# Altium PCB Copy of WoodStoveLayout1.PcbDoc (part 3 of 5)
Units mil, origin at the board's own origin, x right, y up, seen from the top; angles counter-clockwise.
Board outline 4000 x 3000 mil, 4 copper layers (Top Layer, LGND, LPWR, Bottom Layer), stack 64.6 mil thick; 132 components, 92 nets, 551 pads, 393 vias.
Unrouted connection lines stored in the file: 127.
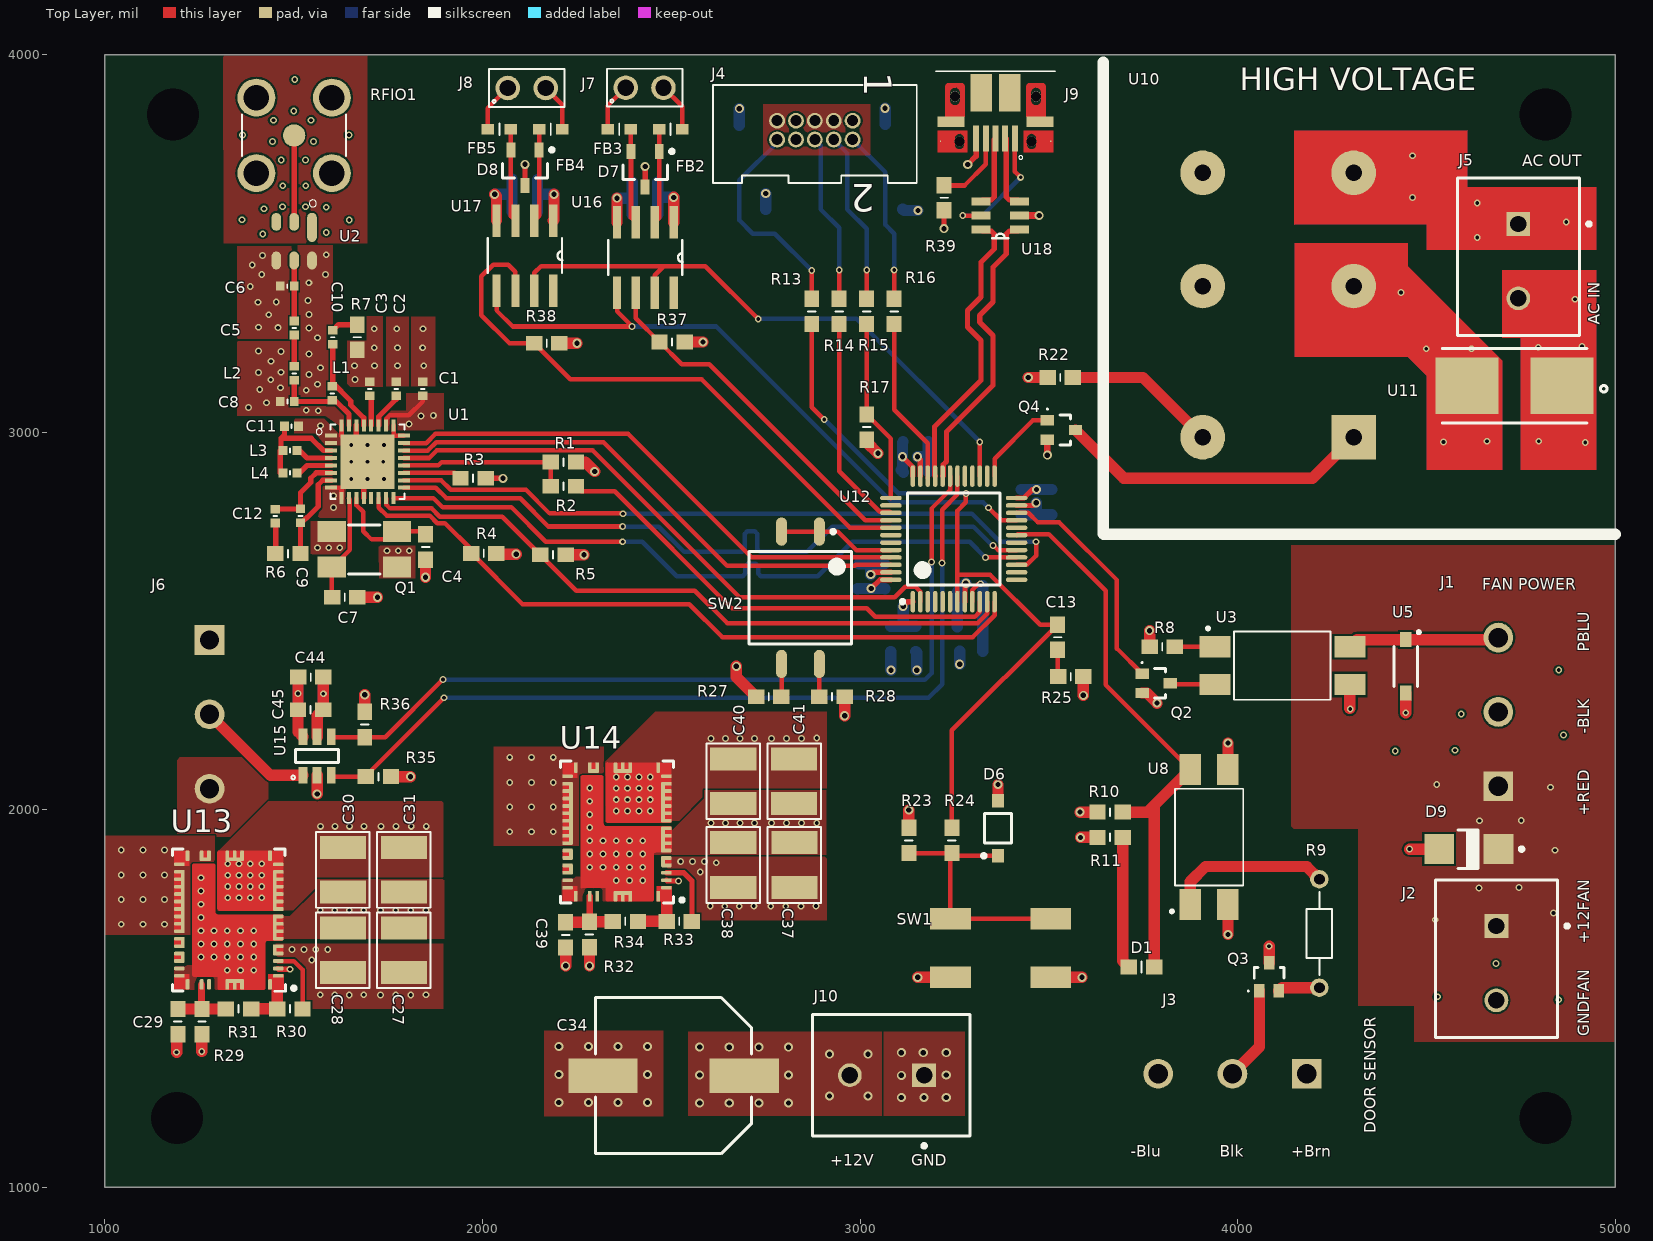
[diagram p0: Top Layer view]

## Part data (continued)
R6: Case/Package=0603, Case Code (Metric)=1608, Manufacturer=Vishay, Manufacturer Part Number=CRCW06036K80FKEA, Max Operating Temperature=155°C, Max Power Dissipation=100mW, Min Operating Temperature=-55°C, Package Quantity=10, Resistance=6.8k, Supplier Part Number 1=541-6.80KHTR-ND, Temperature Coefficient=100ppm/°C, Tolerance=1%, Voltage Rating=75V, Case Code (Imperial)=0603, ComponentLink1Description=https://datasheet.ciiva.com/11811/0900766b80d98afc-11811920.pdf, ComponentLink1URL=https://datasheet.ciiva.com/11811/0900766b80d98afc-11811920.pdf, ComponentLink2Description=https://datasheet.ciiva.com/2465/dcrcwe3-2465684.pdf, ComponentLink2URL=https://datasheet.ciiva.com/2465/dcrcwe3-2465684.pdf, ComponentLink3Description=https://datasheet.ciiva.com/2465/dcrcwe3-2465685.pdf, ComponentLink3URL=https://datasheet.ciiva.com/2465/dcrcwe3-2465685.pdf, ComponentLink4Description=https://datasheet.ciiva.com/2465/dcrcwe3-2465686.pdf, ComponentLink4URL=https://datasheet.ciiva.com/2465/dcrcwe3-2465686.pdf, ComponentLink5Description=https://datasheet.ciiva.com/26314/fld-crcw-e3-data-en-26314745.pdf, ComponentLink5URL=https://datasheet.ciiva.com/26314/fld-crcw-e3-data-en-26314745.pdf, ComponentLink6Description=https://datasheet.ciiva.com/16771/70201119-16771274.pdf, ComponentLink6URL=https://datasheet.ciiva.com/16771/70201119-16771274.pdf, ComponentLink7Description=https://datasheet.ciiva.com/22870/70201119-22870027.pdf, ComponentLink7URL=https://datasheet.ciiva.com/22870/70201119-22870027.pdf, ComponentLink8Description=https://datasheet.ciiva.com/3257/dcrcwe3-3257852.pdf, ComponentLink8URL=https://datasheet.ciiva.com/3257/dcrcwe3-3257852.pdf, ComponentLink9Description=https://datasheet.ciiva.com/7673/1697337-7673148.pdf, ComponentLink9URL=https://datasheet.ciiva.com/7673/1697337-7673148.pdf, ComponentLink10Description=https://datasheet.ciiva.com/3257/dcrcwe3-3257853.pdf, ComponentLink10URL=https://datasheet.ciiva.com/3257/dcrcwe3-3257853.pdf, ComponentLink11Description=https://datasheet.ciiva.com/16508/dcrcwe3-16508431.pdf, ComponentLink11URL=https://datasheet.ciiva.com/16508/dcrcwe3-16508431.pdf, Composition="Thick Film", Contact Plating=Tin, Depth=0.85mm, Height=0.45mm, Lead Free="Lead Free", Length=1.55mm, Military Standard=Not, Number of Terminations=2, Packaging="Tape and Reel", Power Rating=100mW, Pricing 1="5000=0.00497, 10000=0.00432, 25000=0.00405 (USD)", Radiation Hardening=No, REACH SVHC=Unknown, Stock 1=0, Supplier 1=Digi-Key, Termination=SMD/SMT, Voltage Rating (DC)=75V, Weight=7.1E-05oz, Width=0.033inch
R7: Case/Package=0603, Case Code (Metric)=1608, Manufacturer="Vishay Dale", Manufacturer Part Number=CRCW06031R00FKEA, Max Operating Temperature=155°C, Max Power Dissipation=100mW, Min Operating Temperature=-55°C, Package Quantity=10, Resistance=1, Supplier Part Number 1=541-1.00HHTR-ND, Temperature Coefficient=100ppm/°C, Tolerance=1%, Voltage Rating=75V, Case Code (Imperial)=0603, ComponentLink1Description=https://datasheet.ciiva.com/16396/aoa0000ce3-16396837.pdf, ComponentLink1URL=https://datasheet.ciiva.com/16396/aoa0000ce3-16396837.pdf, ComponentLink2Description=https://datasheet.ciiva.com/28691/391509-28691973.pdf, ComponentLink2URL=https://datasheet.ciiva.com/28691/391509-28691973.pdf, ComponentLink3Description=https://datasheet.ciiva.com/16784/70068852-16784839.pdf, ComponentLink3URL=https://datasheet.ciiva.com/16784/70068852-16784839.pdf, ComponentLink4Description=https://datasheet.ciiva.com/9117/aoa0000ce3-9117368.pdf, ComponentLink4URL=https://datasheet.ciiva.com/9117/aoa0000ce3-9117368.pdf, ComponentLink5Description=https://datasheet.ciiva.com/11810/0900766b80eefa12-11810728.pdf, ComponentLink5URL=https://datasheet.ciiva.com/11810/0900766b80eefa12-11810728.pdf, ComponentLink6Description=https://datasheet.ciiva.com/24165/aoa0000ce3-72189-24165336.pdf, ComponentLink6URL=https://datasheet.ciiva.com/24165/aoa0000ce3-72189-24165336.pdf, ComponentLink7Description=https://datasheet.ciiva.com/30060/6aoa0000ce3-30060648.pdf, ComponentLink7URL=https://datasheet.ciiva.com/30060/6aoa0000ce3-30060648.pdf, ComponentLink8Description=https://datasheet.ciiva.com/6138/391509-6138777.pdf, ComponentLink8URL=https://datasheet.ciiva.com/6138/391509-6138777.pdf, ComponentLink9Description=https://datasheet.ciiva.com/16766/70068852-16766778.pdf, ComponentLink9URL=https://datasheet.ciiva.com/16766/70068852-16766778.pdf, ComponentLink10Description=https://datasheet.ciiva.com/16853/aoa0000ce3-16853436.pdf, ComponentLink10URL=https://datasheet.ciiva.com/16853/aoa0000ce3-16853436.pdf, ComponentLink11Description=https://datasheet.ciiva.com/43455/391509-43455868.pdf, ComponentLink11URL=https://datasheet.ciiva.com/43455/391509-43455868.pdf, ComponentLink12Description=https://datasheet.ciiva.com/28547/391509-28547230.pdf, ComponentLink12URL=https://datasheet.ciiva.com/28547/391509-28547230.pdf, ComponentLink13Description=https://datasheet.ciiva.com/7792/1359337-7792119.pdf, ComponentLink13URL=https://datasheet.ciiva.com/7792/1359337-7792119.pdf, ComponentLink14Description=https://datasheet.ciiva.com/2465/dcrcwe3-2465528.pdf, ComponentLink14URL=https://datasheet.ciiva.com/2465/dcrcwe3-2465528.pdf, ComponentLink15Description=https://datasheet.ciiva.com/2465/dcrcwe3-2465529.pdf, ComponentLink15URL=https://datasheet.ciiva.com/2465/dcrcwe3-2465529.pdf, ComponentLink16Description=https://datasheet.ciiva.com/3257/dcrcwe3-3257225.pdf, ComponentLink16URL=https://datasheet.ciiva.com/3257/dcrcwe3-3257225.pdf, ComponentLink17Description=https://datasheet.ciiva.com/2465/dcrcwe3-2465530.pdf, ComponentLink17URL=https://datasheet.ciiva.com/2465/dcrcwe3-2465530.pdf, ComponentLink18Description=https://datasheet.ciiva.com/3257/dcrcwe3-3257226.pdf, ComponentLink18URL=https://datasheet.ciiva.com/3257/dcrcwe3-3257226.pdf, ComponentLink19Description=https://datasheet.ciiva.com/16883/dcrcwe3-16883290.pdf, ComponentLink19URL=https://datasheet.ciiva.com/16883/dcrcwe3-16883290.pdf, ComponentLink20Description=https://datasheet.ciiva.com/16768/70201119-16768957.pdf, ComponentLink20URL=https://datasheet.ciiva.com/16768/70201119-16768957.pdf, ComponentLink21Description=https://datasheet.ciiva.com/28621/1747939-28621389.pdf, ComponentLink21URL=https://datasheet.ciiva.com/28621/1747939-28621389.pdf, ComponentLink22Description=https://datasheet.ciiva.com/5541/dcrcwe3-109170-5541726.pdf, ComponentLink22URL=https://datasheet.ciiva.com/5541/dcrcwe3-109170-5541726.pdf, Composition="Thick Film", Contact Plating=Tin, Depth=0.85mm, Height=0.02inch, Lead Free="Lead Free", Length=1.55mm, Military Standard=Not, Mount="Surface Mount", Number of Pins=2, Number of Terminations=2, Packaging="Tape and Reel", Power Rating=100mW, Pricing 1="5000=0.00497, 10000=0.00432, 25000=0.00405 (USD)", Radiation Hardening=No, REACH SVHC=Unknown, Stock 1=0, Supplier 1=Digi-Key, Termination=SMD/SMT, Voltage Rating (DC)=75V, Weight=7.1E-05oz, Width=0.033inch
R8: Case/Package=0603, Case Code (Metric)=1608, Manufacturer=Vishay, Manufacturer Part Number=CRCW0603110RFKEA, Max Operating Temperature=155°C, Max Power Dissipation=100mW, Min Operating Temperature=-55°C, Package Quantity=10, Resistance=110, Supplier Part Number 1=541-110HTR-ND, Temperature Coefficient=100ppm/°C, Tolerance=1%, Voltage Rating=75V, Case Code (Imperial)=0603, ComponentLink1Description=https://datasheet.ciiva.com/11809/0900766b80d98afc-11809778.pdf, ComponentLink1URL=https://datasheet.ciiva.com/11809/0900766b80d98afc-11809778.pdf, ComponentLink2Description=https://datasheet.ciiva.com/2525/dcrcwe3-2525299.pdf, ComponentLink2URL=https://datasheet.ciiva.com/2525/dcrcwe3-2525299.pdf, ComponentLink3Description=https://datasheet.ciiva.com/2525/dcrcwe3-2525300.pdf, ComponentLink3URL=https://datasheet.ciiva.com/2525/dcrcwe3-2525300.pdf, ComponentLink4Description=https://datasheet.ciiva.com/2525/dcrcwe3-2525301.pdf, ComponentLink4URL=https://datasheet.ciiva.com/2525/dcrcwe3-2525301.pdf, ComponentLink5Description=https://datasheet.ciiva.com/7822/1697337-7822981.pdf, ComponentLink5URL=https://datasheet.ciiva.com/7822/1697337-7822981.pdf, ComponentLink6Description=https://datasheet.ciiva.com/16758/70201119-16758821.pdf, ComponentLink6URL=https://datasheet.ciiva.com/16758/70201119-16758821.pdf, ComponentLink7Description=https://datasheet.ciiva.com/3256/dcrcwe3-3256966.pdf, ComponentLink7URL=https://datasheet.ciiva.com/3256/dcrcwe3-3256966.pdf, ComponentLink8Description=https://datasheet.ciiva.com/7822/1697337-7822982.pdf, ComponentLink8URL=https://datasheet.ciiva.com/7822/1697337-7822982.pdf, ComponentLink9Description=https://datasheet.ciiva.com/3256/dcrcwe3-3256967.pdf, ComponentLink9URL=https://datasheet.ciiva.com/3256/dcrcwe3-3256967.pdf, ComponentLink10Description=https://datasheet.ciiva.com/26316/fld-crcw-e3-data-en-26316567.pdf, ComponentLink10URL=https://datasheet.ciiva.com/26316/fld-crcw-e3-data-en-26316567.pdf, ComponentLink11Description=https://datasheet.ciiva.com/16787/70201119-16787496.pdf, ComponentLink11URL=https://datasheet.ciiva.com/16787/70201119-16787496.pdf, ComponentLink12Description=https://datasheet.ciiva.com/7792/125364-7792010.pdf, ComponentLink12URL=https://datasheet.ciiva.com/7792/125364-7792010.pdf, ComponentLink13Description=https://datasheet.ciiva.com/16885/dcrcwe3-16885194.pdf, ComponentLink13URL=https://datasheet.ciiva.com/16885/dcrcwe3-16885194.pdf, ComponentLink14Description=https://datasheet.ciiva.com/22674/1912744-22674701.pdf, ComponentLink14URL=https://datasheet.ciiva.com/22674/1912744-22674701.pdf, ComponentLink15Description=https://datasheet.ciiva.com/22707/1697337-22707342.pdf, ComponentLink15URL=https://datasheet.ciiva.com/22707/1697337-22707342.pdf, Composition="Thick Film", Contact Plating=Tin, Depth=0.85mm, Height=0.45mm, Lead Free="Lead Free", Length=1.55mm, Military Standard=Not, Mount="Surface Mount", Number of Pins=2, Number of Terminations=2, Packaging="Tape and Reel", Power Rating=100mW, Pricing 1="5000=0.00497, 10000=0.00432, 25000=0.00405 (USD)", Radiation Hardening=No, REACH SVHC=Unknown, Stock 1=35000, Supplier 1=Digi-Key, Termination=SMD/SMT, Voltage Rating (DC)=75V, Weight=7.1E-05oz, Width=0.033inch
R9: Case/Package=Axial, Manufacturer="Stackpole Electronics", Manufacturer Part Number=CFM12JT560R, Max Operating Temperature=155°C, Max Power Dissipation=500mW, Min Operating Temperature=-55°C, Package Quantity=5000, Resistance=560, Supplier Part Number 1=S560HTR-ND, Temperature Coefficient=-400ppm/°C, Tolerance=5%, ComponentLink1Description=https://www.seielect.com/Catalog/SEI-CF_CFM.pdf, ComponentLink1URL=https://www.seielect.com/Catalog/SEI-CF_CFM.pdf, Composition="Carbon Film", Contact Plating=Tin,Matte, Diameter=2.3mm, Lead Free="Lead Free", Length=0.256inch, Mount="Through Hole,Axial", Number of Terminations=2, Packaging="Tape and Reel", Pricing 1="5000=0.00703, 10000=0.00611, 25000=0.00537, 50000=0.00492, 125000=0.00482 (USD)", Radiation Hardening=No, Stock 1=0, Supplier 1=Digi-Key